# EAGLE board DXM-OOBD4 - V2 (EAGLE 5.11)
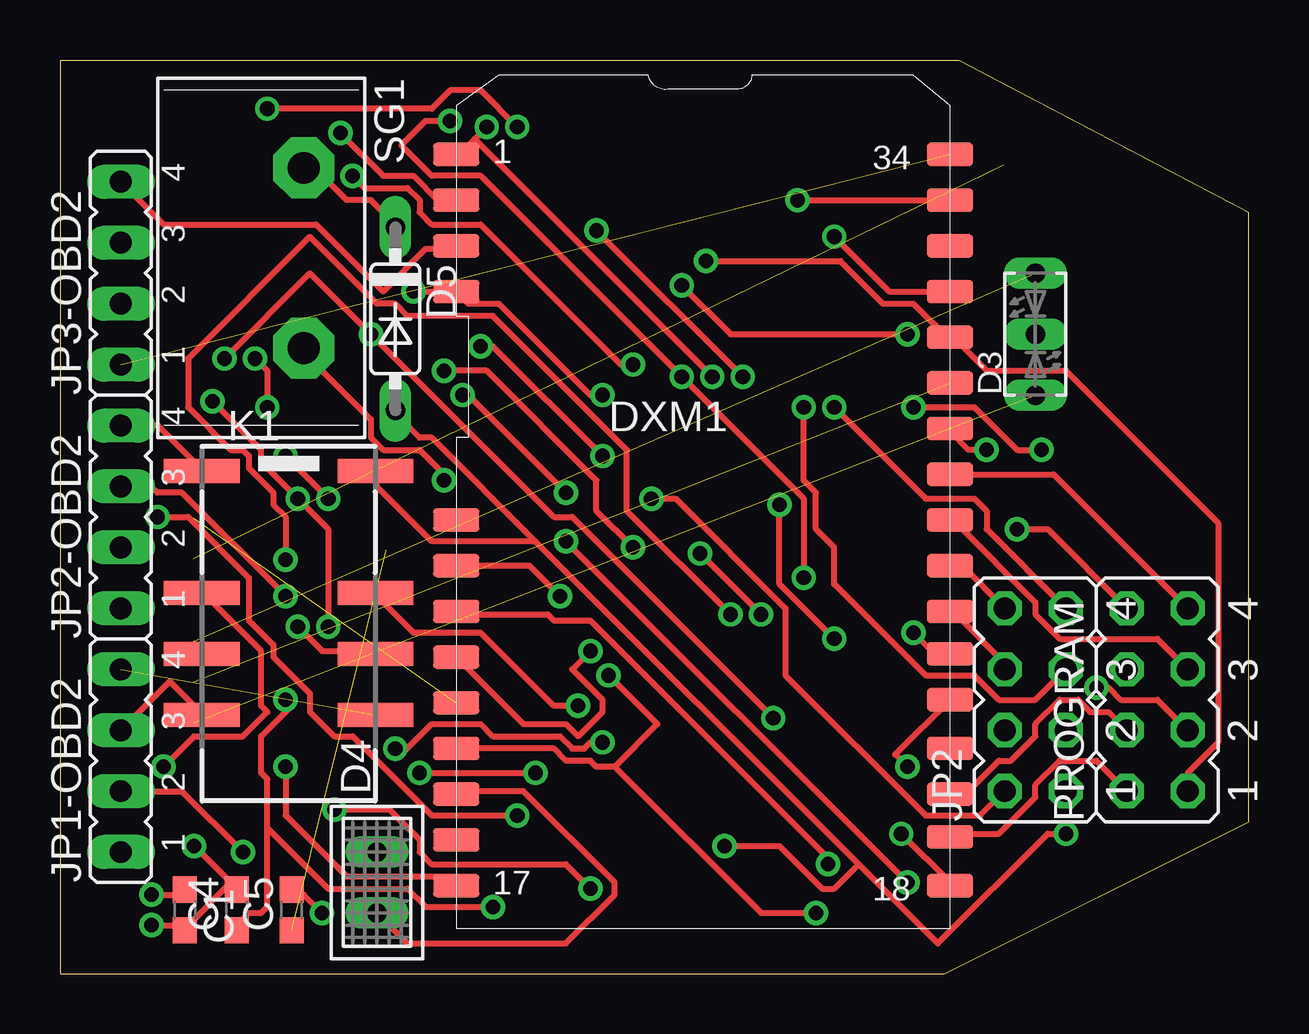
[diagram p0: board, top side]
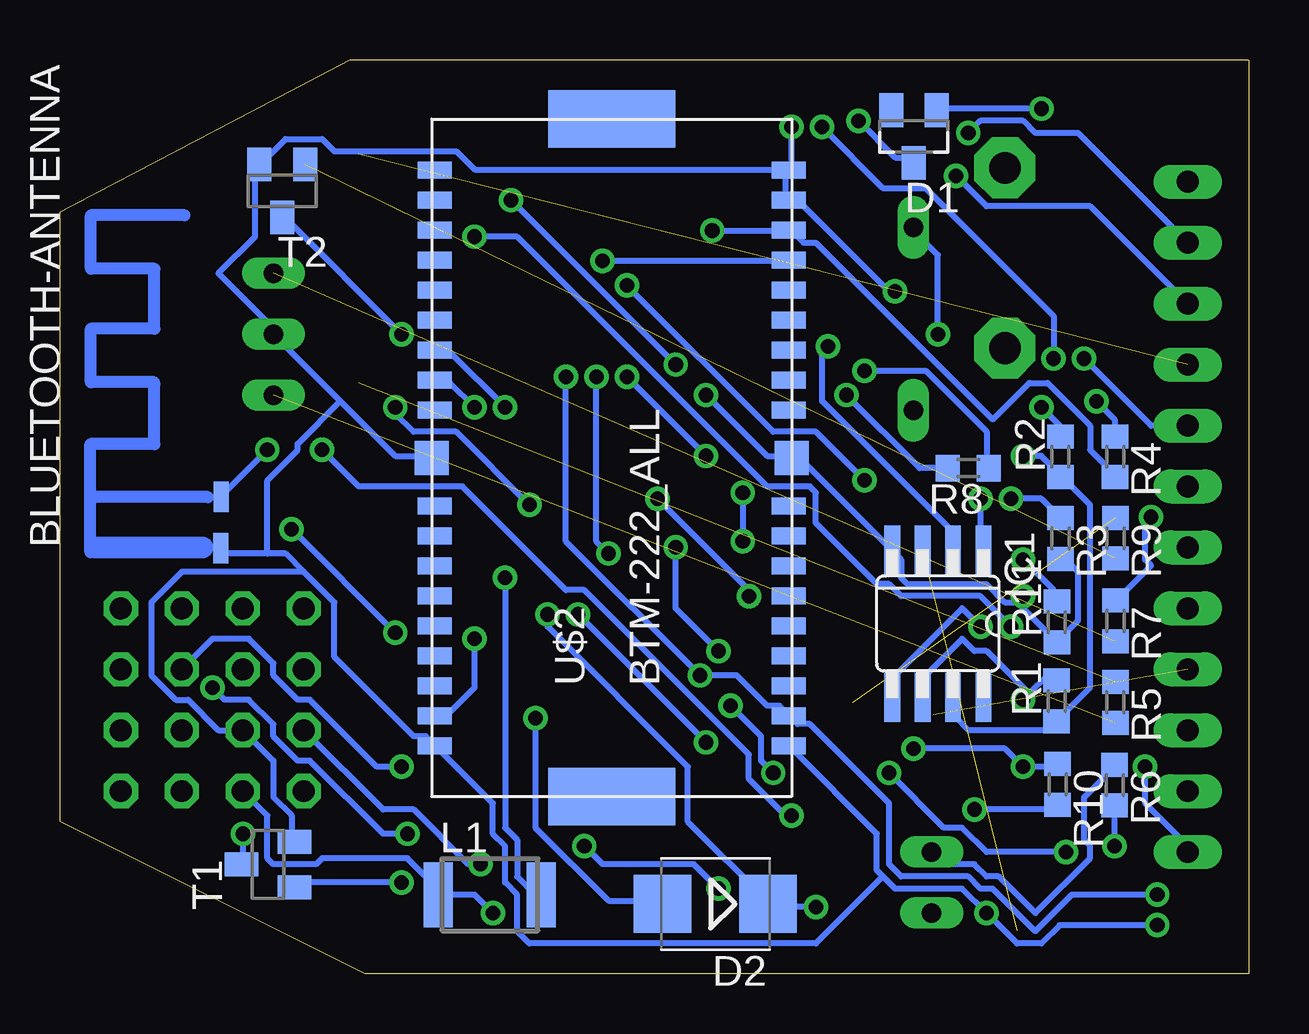
[diagram p1: board, bottom side, seen from below]

Size 49.53 x 38.1 mm. Coordinates in mm from the lower left corner, seen from the top.
Outline: 0,38.09 0,0 36.84,0 49.53,6.35
Outline: 0.01,38.1 37.46,38.1
Outline: 37.46,38.09 49.53,31.75 49.53,6.36
Copper layers (1*16): Top 0.035mm / dielectric 1.5mm / Bottom 0.035mm
Design rules "default *": minimum track width 10mil, minimum drill 24mil, track to track 8mil, track to pad 8mil, pad to pad 8mil, via to via 8mil, smd to smd 8mil, copper to edge 40mil, drill to drill 8mil, minimum pad ring 10mil, minimum via ring 8mil, stop-mask expansion 4mil, vias tented up to drill 0mil, thermal gap 10mil
bRestrict: area 43.8,17.1 to 48.9,32.4

## Footprints (pad centres in the part's own frame; a part is rotated, then mirrored left to right if it is on the bottom)
BLUETOOTH-ANTENNA = smd 1.27 x 0.635: P$1 -19.088,0.926; P$2 -16.942,0.901
C0603 = smd 1.1 x 1: 1 -0.85,0; 2 0.85,0
SOT23 = smd 1 x 1.4: 1 -0.95,-1.1; 2 0.95,-1.1; 3 0,1.1
SMB = smd 2.4 x 2.4: A 2.2,0; C -2.2,0
DUOLED2X5 = drill 0.813 long: AG -2.54,0; AR 2.54,0; K 0,0
U57X32 = drill 0.813 long: A -1.27,0; K 1.27,0
DO35-7 = drill 0.813 long: A 3.81,0; C -3.81,0
DMX1-MINI = smd 1.93 x 0.965: 1 0,32.258; 2 0,30.353; 3 0,28.448; 4 0,26.543; 9 0,17.018; 10 0,15.113; 11 0,13.208; 12 0,11.303; 13 0,9.398; 14 0,7.493; 15 0,5.588; 16 0,3.683; 17 0,1.778; 18 20.574,1.778; 19 20.574,3.81; 20 20.574,5.588; 21 20.574,7.493; 22 20.574,9.525; 23 20.574,11.43; 24 20.574,13.208; 25 20.574,15.113; 26 20.574,17.018; 27 20.574,18.923; 28 20.574,20.828; 29 20.574,22.733; 30 20.574,24.638; 31 20.574,26.543; 32 20.574,28.448; 33 20.574,30.353; 34 20.574,32.258
SO8 = smd 0.66 x 2.032: 1 -1.905,-3.073; 2 -0.635,-3.073; 3 0.635,-3.073; 4 1.905,-3.073; 5 1.905,3.073; 6 0.635,3.073; 7 -0.635,3.073; 8 -1.905,3.073
JP4 = drill 0.914 long: 1 -3.81,0; 2 -1.27,0; 3 1.27,0; 4 3.81,0
JP4Q = drill 0.914 octagon: 1 -3.81,-1.27; 2 -3.81,1.27; 3 -1.27,-1.27; 4 -1.27,1.27; 5 1.27,-1.27; 6 1.27,1.27; 7 3.81,-1.27; 8 3.81,1.27
TXD2SA = smd 1 x 3.16: 1 -6.35,-3.62; 3 -1.27,-3.62; 4 1.27,-3.62; 5 3.81,-3.62; 8 3.81,3.62; 9 1.27,3.62; 10 -1.27,3.62; 12 -6.35,3.62
SM-NE45 = smd 1.2 x 2.7: 1 -2.15,0; 2 2.15,0
R0603 = smd 1 x 1.1: 1 -0.85,0; 2 0.85,0
B/C11S = drill 1.321 pad 2.54 octagon: 1 -3.759,0; 2 3.759,0
BTM-222 = smd 2.4 x 5.3: $AGND -14.625,3.75; $BGND 13.625,3.75 | smd 0.711 x 1.422: P$1 -12.5,-3.625; P$2 -11.25,-3.625; P$3 -10,-3.625; P$4 -8.75,-3.625; P$5 -7.5,-3.625; P$6 -6.25,-3.625; P$7 -5,-3.625; P$8 -3.75,-3.625; P$9 -2.5,-3.625; P$11 1.5,-3.625; P$12 2.75,-3.625; P$13 4,-3.625; P$14 5.25,-3.625; P$15 6.5,-3.625; P$16 7.75,-3.625; P$17 9,-3.625; P$18 10.25,-3.625; P$19 11.5,-3.625; P$20 11.5,11.125; P$21 10.25,11.125; P$22 9,11.125; P$23 7.75,11.125; P$24 6.5,11.125; P$25 5.25,11.125; P$26 4,11.125; P$27 2.75,11.125; P$28 1.5,11.125; P$30 -2.5,11.125; P$31 -3.75,11.125; P$32 -5,11.125; P$33 -6.25,11.125; P$34 -7.5,11.125; P$35 -8.75,11.125; P$36 -10,11.125; P$37 -11.25,11.125; P$38 -12.5,11.125 | smd 1.422 x 1.4: P$10 -0.5,-3.75; P$29 -0.5,11.25

## Placement (x,y rotation side)
BLUETOOTH-ANTENNA  [BLUETOOTH-ANTENNA]  41.91,36.83 90 bottom
C1  1µF  [C0603]  5.21,2.67 270 top
C4  100nF  [C0603]  7.37,2.67 90 top
C5  470pF  [C0603]  9.65,2.67 90 top
D1  BAS40  [SOT23]  13.95,34.91 180 bottom
D2  B140  [SMB]  22.22,2.92 180 bottom
D3  [DUOLED2X5]  40.64,26.67 90 top
D4  U57X32  [U57X32]  13.21,3.81 90 top
D5  1N4148DO35-7  [DO35-7]  13.97,27.31 270 top
DXM1  [DMX1-MINI]  16.51,1.91 0 top
IC1  MC34063-SO  [SO8]  12.95,14.61 180 bottom
JP1-OBD2  [JP4]  2.54,8.89 90 top
JP2  [JP4Q]  40.64,11.43 90 top
JP2-OBD2  [JP4]  2.54,19.05 90 top
JP3-OBD2  [JP4]  2.54,29.21 90 top
K1  TXD2SA-12V  [TXD2SA]  9.53,14.61 270 top
L1  220µH  [SM-NE45]  31.62,3.3 0 bottom
PROGRAM  [JP4Q]  45.72,11.43 90 top
R1  1R  [R0603]  8,11.38 90 bottom
R2  1R  [R0603]  7.85,21.56 90 bottom
R3  1K  [R0603]  7.84,18.16 270 bottom
R4  1K6  [R0603]  5.57,21.56 270 bottom
R5  100R  [R0603]  5.56,11.32 270 bottom
R6  120R  [R0603]  5.59,7.87 270 bottom
R7  100R  [R0603]  5.55,14.71 270 bottom
R8  4K7  [R0603]  11.68,21.08 180 bottom
R9  4K7  [R0603]  5.55,18.16 270 bottom
R10  180k  [R0603]  7.96,7.9 270 bottom
R11  47k  [R0603]  7.99,14.67 90 bottom
SG1  B/C11S  [B/C11S]  10.16,29.84 270 top
T1  BC847  [SOT23]  40.86,4.57 90 bottom
T2  BC847  [SOT23]  40.27,32.64 180 bottom
U$2  BTM-222_ALL  [BTM-222]  22.79,22.01 90 bottom

## Library data of the parts
BLUETOOTH-ANTENNA = bluetooth-antenna
C1 C4 C5 = resistor
D1 D2 D5 = diode
D3 D4 = led
DXM1 = DXM
IC1 = mc34063
JP1-OBD2 JP2 JP2-OBD2 JP3-OBD2 PROGRAM = jumper
K1 = relay; MPN: TXD2SA-12V; OC_FARNELL: unknown; OC_NEWARK: 13P9526
L1 = inductor-neosid; OC_FARNELL: unknown; OC_NEWARK: unknown
R1-R11 = rcl
SG1 = buzzer; OC_FARNELL: unknown; OC_NEWARK: unknown
T1 T2 = transistor
U$2 = BTM_222

## Nets
3V3OUT: DXM1.9
+3V3: C1.1 DXM1.14 JP2.1 L1.1 R4.2 U$2.P$2 U$2.P$17
+12V: D2.A D5.C JP2-OBD2.4 K1.1 SG1.1
A0: DXM1.18 PROGRAM.3
ANTENNA: BLUETOOTH-ANTENNA.P$2 U$2.P$37
CS: DXM1.19 PROGRAM.2
CTS: DXM1.26 PROGRAM.5
GND: BLUETOOTH-ANTENNA.P$1 C1.2 C4.2 C5.2 D1.1 D3.K DXM1.4 IC1.4 JP2-OBD2.3 JP2.3 R3.2 R6.2 R11.1 T1.2 T2.2 U$2.P$1 U$2.P$10 U$2.P$18 U$2.P$19 U$2.P$29 U$2.P$38
HS_CAN-H: JP1-OBD2.3 K1.5
HS_CAN-L: JP1-OBD2.4 K1.8
K-LINE: DXM1.33 JP3-OBD2.2
L-LINE: DXM1.34 JP3-OBD2.1
MISO: DXM1.22 PROGRAM.6
MOSI: DXM1.23 PROGRAM.8
MS_CAN-H: JP1-OBD2.1 K1.3
MS_CAN-L: JP1-OBD2.2 K1.10
N$1: IC1.5 R3.1 R4.1
N$2: C5.1 IC1.3
N$3: D1.3 IC1.2 L1.2
N$4: D3.AR R7.2
N$5: IC1.1 IC1.7 R1.1 R2.1
N$6: D3.AG R5.2
N$7: D4.K R6.1
N$8: D4.A DXM1.15
N$9: DXM1.29 R5.1
N$10: DXM1.25 JP2.8
N$11: C4.1 D2.C DXM1.1 IC1.6 R1.2 R2.2
N$12: DXM1.24 JP2.6
N$13: JP2.5 U$2.P$26
N$14: JP2.7 U$2.P$27
N$15: DXM1.28 R7.1
N$16: DXM1.10 JP2.2
N$17: DXM1.11 JP2.4
N$19: DXM1.17 R10.1 R11.2
N$20: R8.2 T1.1
N$21: K1.4
N$22: DXM1.31 K1.9
N$23: SG1.2 T2.3
N$24: R9.2 T2.1
N$25: DXM1.12 R8.1
N$26: DXM1.13 R9.1
N$27: D5.A K1.12 R10.2 T1.3
NOT_RESET: DXM1.30 PROGRAM.1 U$2.P$16
PWM+: DXM1.2 JP3-OBD2.3
PWM-: DXM1.3 JP3-OBD2.4
RTS: DXM1.27 PROGRAM.7
SCK: DXM1.20 PROGRAM.4

## Tracks (layer width: path | path; a pad name or v marks a point on that pad's centre or on a via)
+3V3  (via drill 0.61)
  Top 0.254: v3.81,3.3 5.08,3.3 C1.1 | DXM1.14 20.57,9.4 21.08,8.89 22.1,8.89 22.35,8.64 23.11,8.64 | 23.11,8.64 24.89,10.41 v22.86,12.45 | v31.5,2.54 29.21,2.54 23.11,8.64 | v28.45,24.89 v22.35,30.99
  Bottom 0.254: R4.2 5.59,20.83 6.6,21.84 6.6,22.86 8.38,24.64 9.14,24.64 10.67,23.11 18.03,30.48 18.54,30.48 19.05,30.99 U$2.P$17 19.3,30.99 v22.35,30.99 | JP2.1 40.89,6.6 40.89,4.83 40.64,4.57 38.86,4.57 38.61,4.83 35.05,4.83 33.78,3.56 33.78,3.3 L1.1 32.26,3.3 v31.5,2.54 | v3.81,3.3 7.37,3.3 8.89,1.78 10.67,3.56 11.18,3.56 11.68,4.06 14.48,4.06 14.99,4.57 14.99,7.11 18.29,10.41 18.8,10.41 19.05,10.67 U$2.P$2 19.3,10.92 19.56,11.18 20.07,11.18 21.34,12.45 v22.86,12.45 28.45,18.03 v28.45,24.89
+12V  (via drill 0.61)
  Top 0.254: JP2-OBD2.4 4.06,22.86 5.84,21.08 K1.1 | v29.72,10.67 21.34,19.05 20.57,19.05 v12.95,26.67 10.41,29.21 v6.86,25.65 | SG1.1 10.16,33.53 10.67,33.53 11.94,32.26 12.95,32.26 13.97,31.24 D5.C
  Bottom 0.254: v29.72,10.67 29.72,6.1 26.67,3.05 24.64,3.05 D2.A | v12.95,26.67 12.95,29.97 13.97,30.99 D5.C | JP2-OBD2.4 4.06,22.86 v6.86,25.65
A0  (via drill 0.61)
  Top 0.254: v35.05,5.84 37.08,3.81 DXM1.18 | v43.18,11.94 43.69,11.94 44.2,11.43 45.72,11.43 PROGRAM.3
  Bottom 0.254: v35.05,5.84 36.07,5.84 39.12,8.89 39.62,8.89 40.64,9.91 40.64,10.41 41.66,11.43 42.67,11.43 v43.18,11.94
ANTENNA  (via drill 0.61)
  Top 0.254: v40.89,21.84 39.88,21.84 38.1,23.62 v35.56,23.62 | v29.97,19.56 29.97,16.26 v32.26,13.97
  Bottom 0.254: v40.89,21.84 42.67,20.07 BLUETOOTH-ANTENNA.P$2 | v35.56,23.62 35.56,23.37 34.8,22.61 33.02,22.61 v29.97,19.56 | v32.26,13.97 32.26,11.94 33.53,10.67 33.78,10.92 U$2.P$37
CS
  Top 0.254: PROGRAM.2 43.18,8.89 41.66,8.89 40.64,7.87 40.64,7.37 39.12,5.84 37.08,5.84 DXM1.19
CTS
  Top 0.254: PROGRAM.5 45.72,13.97 41.66,13.97 40.64,14.99 40.64,15.49 37.34,18.8 37.08,18.8 DXM1.26
GND  (via drill 0.61)
  Top 0.254: 7.11,3.81 5.33,2.03 C1.2 5.08,2.03 v3.81,2.03 | 7.11,3.81 7.37,3.56 C4.2 7.11,3.81 | 7.11,3.81 v5.59,5.33 | v10.92,2.54 10.16,3.3 9.65,3.3 C5.2 | JP2-OBD2.3 3.81,20.32 4.06,20.07 5.08,20.07 v9.4,15.75 | v8.64,36.07 15.49,36.07 16.26,36.83 17.53,36.83 v19.05,35.31 | v14.73,28.45 DXM1.4 17.02,27.94 18.29,27.94 22.1,24.13 v22.61,24.13
  Bottom 0.254: v5.59,5.33 R6.2 | 15.24,4.06 15.49,4.32 15.49,5.84 19.05,9.4 U$2.P$1 | 15.24,4.06 14.73,3.56 11.94,3.56 v10.92,2.54 9.65,1.27 8.64,1.27 7.87,2.03 v3.81,2.03 | T1.2 39.88,5.59 39.88,6.6 40.64,7.37 40.64,8.89 JP2.3 42.93,10.16 44.2,11.43 44.7,11.43 45.72,12.45 45.72,15.49 44.45,16.76 39.37,16.76 | 40.89,17.53 40.13,17.53 39.37,16.76 | 40.89,17.53 42.67,17.53 BLUETOOTH-ANTENNA.P$1 | 39.37,16.76 38.1,15.49 38.1,13.21 34.8,9.91 34.29,9.91 34.04,9.65 U$2.P$38 33.78,9.4 31.5,7.11 31.5,5.84 30.99,5.33 30.99,3.81 30.48,3.3 30.48,1.78 29.97,1.27 18.03,1.27 15.24,4.06 | R3.2 7.62,17.27 7.11,16.76 7.11,14.73 7.87,13.97 R11.1 8.13,13.97 9.65,15.49 | 9.65,15.49 10.16,15.49 10.92,16.26 14.22,16.26 14.48,16.51 14.48,17.27 14.73,17.53 IC1.4 14.99,17.78 18.54,21.34 18.8,21.34 U$2.P$10 19.05,21.59 20.07,21.59 v22.61,24.13 | 9.65,15.49 v9.4,15.75 | v8.64,36.07 12.95,36.07 D1.1 | v19.05,35.31 19.05,33.53 U$2.P$19 | U$2.P$19 19.3,33.27 19.3,32.51 U$2.P$18 19.05,32.51 14.99,28.45 v14.73,28.45 | 37.85,23.88 D3.K 40.64,26.92 42.93,29.21 41.4,30.73 41.4,33.53 T2.2 41.15,33.78 40.13,34.8 38.61,34.8 38.1,34.29 33.02,34.29 32.26,33.53 19.3,33.53 U$2.P$19 | 37.85,23.88 35.56,21.59 34.29,21.59 U$2.P$29 | 40.89,17.53 40.89,20.57 39.62,21.84 39.62,22.1 37.85,23.88
HS_CAN-H
  Top 0.254: JP1-OBD2.3 4.57,12.19 5.84,10.92 K1.5
HS_CAN-L  (1 unrouted)
K-LINE  (via drill 0.61)
  Top 0.254: v30.73,32.26 DXM1.33 | v23.88,25.4 23.37,25.4 17.53,31.24 15.49,31.24 14.99,31.75 14.99,32.26 14.48,32.77 12.7,32.77 v12.19,33.27
  Bottom 0.254: v23.88,25.4 v30.73,32.26 | v12.19,33.27 10.92,32 6.6,32 JP3-OBD2.2
L-LINE  (1 unrouted)
MISO  (via drill 0.61)
  Top 0.254: DXM1.22 34.8,9.14 v35.31,8.64
  Bottom 0.254: v35.31,8.64 36.32,8.64 39.12,11.43 39.62,11.43 40.64,12.45 40.64,12.95 41.66,13.97 43.18,13.97 PROGRAM.6
MOSI  (via drill 0.61)
  Top 0.254: v35.56,14.22 36.32,13.46 37.08,13.46 DXM1.23 | v39.88,18.54 41.15,18.54 PROGRAM.8
  Bottom 0.254: v35.56,14.22 v39.88,18.54
MS_CAN-H  (via drill 0.61)
  Top 0.254: v4.32,8.64 5.59,9.91 7.62,9.91 8.64,10.92 8.38,11.18 8.38,13.46 6.1,15.75 K1.3
  Bottom 0.254: JP1-OBD2.1 2.54,5.33 4.32,7.11 v4.32,8.64
MS_CAN-L  (via drill 0.61)
  Top 0.254: JP1-OBD2.2 5.08,7.62 v7.62,5.08 | v14.99,8.38 v19.81,8.38 | v21.59,11.18 20.57,11.18 17.53,14.22 14.73,14.22 13.21,15.75 K1.10
  Bottom 0.254: v7.62,5.08 10.92,5.08 11.94,6.1 12.7,6.1 v14.99,8.38 | v19.81,8.38 20.32,8.89 20.32,9.91 v21.59,11.18
N$1  (via drill 0.61)
  Top 0.254: v6.35,23.88 8.38,21.84 8.38,21.34 v9.91,19.81 11.18,18.54 v11.18,14.48
  Bottom 0.254: v6.35,23.88 5.59,23.11 5.59,22.61 R4.1 | v9.91,19.81 8.64,19.81 7.87,19.05 R3.1 | v11.18,14.48 11.94,15.24 14.73,12.45 14.73,11.68 IC1.5
N$2  (1 unrouted)
N$3  (via drill 0.61)
  Top 0.254: v16.26,35.56 15.24,35.56 14.22,34.54 15.49,33.27 17.53,33.27 v25.91,24.89 30.99,19.81 v30.99,16.51 | v17.53,26.16 18.03,26.16 v22.61,21.59
  Bottom 0.254: v16.26,35.56 14.73,34.04 13.97,34.04 D1.3 | v30.99,16.51 30.99,6.1 30.48,5.59 30.48,4.06 29.72,3.3 L1.2 | v17.53,26.16 17.78,25.91 17.78,23.88 12.45,18.54 12.45,17.78 IC1.2 | v22.61,21.59 v25.91,24.89
N$4  (1 unrouted)
N$5  (via drill 0.61)
  Top 0.254: v9.4,21.59 v11.18,19.81
  Bottom 0.254: v11.18,19.81 11.18,17.78 IC1.1 | v9.4,21.59 8.64,21.59 7.87,20.83 R2.1 7.62,20.57 6.6,19.56 6.6,11.94 7.87,10.67 R1.1 8.13,10.41 8.38,10.16 11.68,10.16 12.19,10.67 12.19,11.43 IC1.7
N$6  (1 unrouted)
N$7
  Bottom 0.254: D4.K 12.7,4.57 11.43,4.57 10.92,4.06 10.41,4.06 8.89,2.54 6.6,4.83 6.6,5.33 6.86,5.59 6.86,7.37 5.59,8.64 R6.1
N$8
  Top 0.254: D4.A 14.48,1.27 21.08,1.27 23.11,3.3 23.11,3.81 19.3,7.62 16.51,7.62 DXM1.15
N$9  (1 unrouted)
N$10
  Top 0.254: DXM1.25 37.59,17.02 JP2.8
N$11  (via drill 0.61)
  Top 0.254: v8.64,23.62 8.64,25.15 v8.13,25.65 | 17.27,34.8 16.51,34.04 DXM1.1 | 17.27,34.8 v17.78,35.31 | 8.64,6.1 8.64,8.13 8.38,8.38 8.38,9.91 9.65,11.18 v9.4,11.43 | 8.64,6.1 8.64,2.79 8.38,2.54 7.87,2.54 7.37,2.03 C4.1 | v18.03,2.79 15.24,2.79 14.48,3.56 11.18,3.56 8.64,6.1 | v27.18,24.89 17.27,34.8 | v29.21,14.99 v26.67,17.53
  Bottom 0.254: v8.64,23.62 7.87,22.86 7.87,22.61 R2.2 | v8.13,25.65 8.13,27.43 13.46,32.77 15.24,32.77 v17.78,35.31 | 9.14,11.68 8.38,12.45 8.13,12.19 R1.2 | 9.14,11.68 10.92,13.46 11.43,13.46 11.94,13.97 13.46,12.45 13.46,11.68 IC1.6 | v9.4,11.43 9.14,11.68 | v18.03,2.79 19.81,2.79 D2.C 20.07,3.05 23.37,6.35 23.37,8.64 29.21,14.48 v29.21,14.99 | v27.18,24.89 27.18,18.03 v26.67,17.53
N$12
  Top 0.254: JP2.6 39.37,12.95 37.34,14.99 37.08,14.99 DXM1.24
N$13  (via drill 0.61)
  Top 0.254: v30.99,23.62 30.99,20.57 31.5,20.07 31.5,18.54 32.26,17.78 32.26,16.26 36.07,12.45 38.1,12.45 39.12,11.43 40.64,11.43 JP2.5
  Bottom 0.254: v30.99,23.62 33.27,25.91 33.78,25.91 U$2.P$26
N$14  (via drill 0.61)
  Top 0.254: v32.26,23.62 36.07,19.81 38.1,19.81 38.61,19.3 38.61,18.54 JP2.7
  Bottom 0.254: v32.26,23.62 33.27,24.64 33.78,24.64 U$2.P$27
N$15  (via drill 0.61)
  Top 0.254: v4.06,19.05 5.33,19.05 7.87,16.51 7.87,14.73 8.89,13.72 8.89,13.21 10.41,11.68 10.41,10.92 11.43,9.91 12.19,9.91 15.49,6.6 v19.05,6.6 | v38.61,21.84 37.85,21.84 37.08,22.61 DXM1.28
  Bottom 0.254: v4.06,19.05 4.32,18.8 4.32,17.27 4.06,17.02 5.33,15.75 R7.1 | v19.05,6.6 19.3,6.6 20.83,8.13 20.83,9.14 27.69,16 28.45,16 32.77,20.32 37.08,20.32 v38.61,21.84
N$16  (via drill 0.61)
  Top 0.254: DXM1.10 19.56,17.02 v20.83,15.75 | v24.64,19.81 25.65,19.81 30.23,15.24 30.23,12.45 36.07,6.6 38.35,6.6 JP2.2
  Bottom 0.254: v20.83,15.75 20.83,16 v24.64,19.81
N$17  (via drill 0.61)
  Top 0.254: v32,4.57 32,4.83 22.1,14.73 20.57,14.73 20.32,14.99 16.51,14.99 DXM1.11
  Bottom 0.254: v32,4.57 32.51,4.57 34.8,6.86 36.07,6.86 JP2.4
N$19  (via drill 0.61)
  Top 0.254: v9.4,8.64 9.4,6.6 11.94,4.06 16.26,4.06 16.51,3.81 DXM1.17 | v9.4,17.27 9.4,19.05 8.89,19.56 8.89,20.07 7.87,21.08 7.87,21.59 7.62,21.84 7.11,21.84 5.33,23.62 5.33,25.65 10.41,30.73 13.21,27.94 13.97,27.94 14.48,27.43 18.03,27.43 23.62,21.84 23.62,19.3 v27.94,14.99 | v22.61,9.65 22.1,9.65 21.84,9.4 21.34,9.4 20.83,9.91 18.03,9.91 17.53,10.41 15.49,10.41 14.22,9.14 v13.97,9.4
  Bottom 0.254: R10.1 8.13,8.64 v9.4,8.64 10.16,9.4 v13.97,9.4 | v9.4,17.27 8.13,16 8.13,15.75 R11.2 | v22.61,9.65 v27.94,14.99
N$20  (via drill 0.61)
  Top 0.254: v16.76,24.13 17.02,24.13 v21.08,20.07 | v21.08,18.03 v35.31,3.81
  Bottom 0.254: v16.76,24.13 13.72,21.08 R8.2 | v21.08,20.07 v21.08,18.03 | v35.31,3.81 39.62,3.81 T1.1
N$22  (via drill 0.61)
  Top 0.254: DXM1.31 34.54,28.45 v32.26,30.73 | v9.91,14.48 10.92,13.46 12.95,13.46 K1.9
  Bottom 0.254: v32.26,30.73 30.48,30.73 20.07,20.32 18.29,20.32 18.03,20.07 18.03,18.8 15.49,16.26 14.99,16.26 14.48,15.75 11.18,15.75 v9.91,14.48
N$23  (via drill 0.61)
  Top 0.254: v35.31,26.67 27.94,26.67 v25.91,28.7 | v16,20.57 16,20.83 14.99,21.84 13.46,21.84 12.95,22.35 12.95,23.11 10.16,25.91 SG1.2
  Bottom 0.254: v35.31,26.67 40.13,31.5 T2.3 | v25.91,28.7 19.81,22.61 18.03,22.61 v16,20.57
N$24  (1 unrouted)
N$25  (via drill 0.61)
  Top 0.254: v16,25.15 17.78,25.15 22.35,20.57 22.35,19.3 v23.88,17.78 | v22.1,13.46 21.34,12.7 22.61,11.43 22.61,10.92 21.59,9.91 21.08,10.41 19.3,10.41 DXM1.12
  Bottom 0.254: v16,25.15 13.46,25.15 10.92,22.61 10.92,21.08 R8.1 | v23.88,17.78 23.88,15.24 v22.1,13.46
N$26  (1 unrouted)
N$27  (via drill 0.61)
  Top 0.254: v11.43,6.86 13.72,6.86 14.99,5.59 14.99,5.08 15.49,4.57 21.08,4.57 v22.1,3.56 | v27.69,5.33 29.97,5.33 31.75,3.56 32.26,3.56 33.27,4.57 | 19.81,18.03 15.49,22.35 14.99,22.35 13.97,23.37 D5.A | 33.27,4.57 19.81,18.03 | v41.91,5.84 41.15,5.84 36.58,1.27 33.27,4.57 | 19.81,18.03 15.49,18.03 13.21,20.32 13.21,20.83 K1.12
  Bottom 0.254: v11.43,6.86 8.13,6.86 R10.2 | v22.1,3.56 23.11,4.57 26.92,4.57 v27.69,5.33 | v41.91,5.84 41.91,4.57 T1.3
NOT_RESET  (via drill 0.61)
  Top 0.254: v26.92,29.72 32.51,29.72 34.29,27.94 35.56,27.94 37.08,26.42 DXM1.30 37.08,26.67 38.61,25.15 41.91,25.15 48.26,18.8 48.26,9.65 46.99,8.38 PROGRAM.1
  Bottom 0.254: v26.92,29.72 19.3,29.72 U$2.P$16
PWM+  (via drill 0.61)
  Top 0.254: DXM1.2 15.75,32.26 14.73,33.27 13.46,33.27 v11.68,35.05
  Bottom 0.254: v11.68,35.05 11.18,35.56 9.4,35.56 8.89,35.05 7.11,35.05 JP3-OBD2.3
PWM-
  Top 0.254: JP3-OBD2.4 4.32,31.24 10.67,31.24 13.46,28.45 15.24,30.23 16.51,30.23 DXM1.3
RTS
  Top 0.254: DXM1.27 41.4,20.83 PROGRAM.7
SCK
  Top 0.254: PROGRAM.4 43.69,10.92 42.93,10.92 42.42,11.43 41.66,11.43 40.64,10.41 40.64,9.91 39.62,8.89 39.12,8.89 37.85,7.62 37.08,7.62 DXM1.20